# Altium PCB Electronic_Load_1.PcbDoc
Units mm, origin at the board's own origin, x right, y up, seen from the top; angles counter-clockwise.
Board outline 99.82 x 90.42 mm, 2 copper layers (Top Layer, Bottom Layer); 52 components, 43 nets, 171 pads, 0 vias.
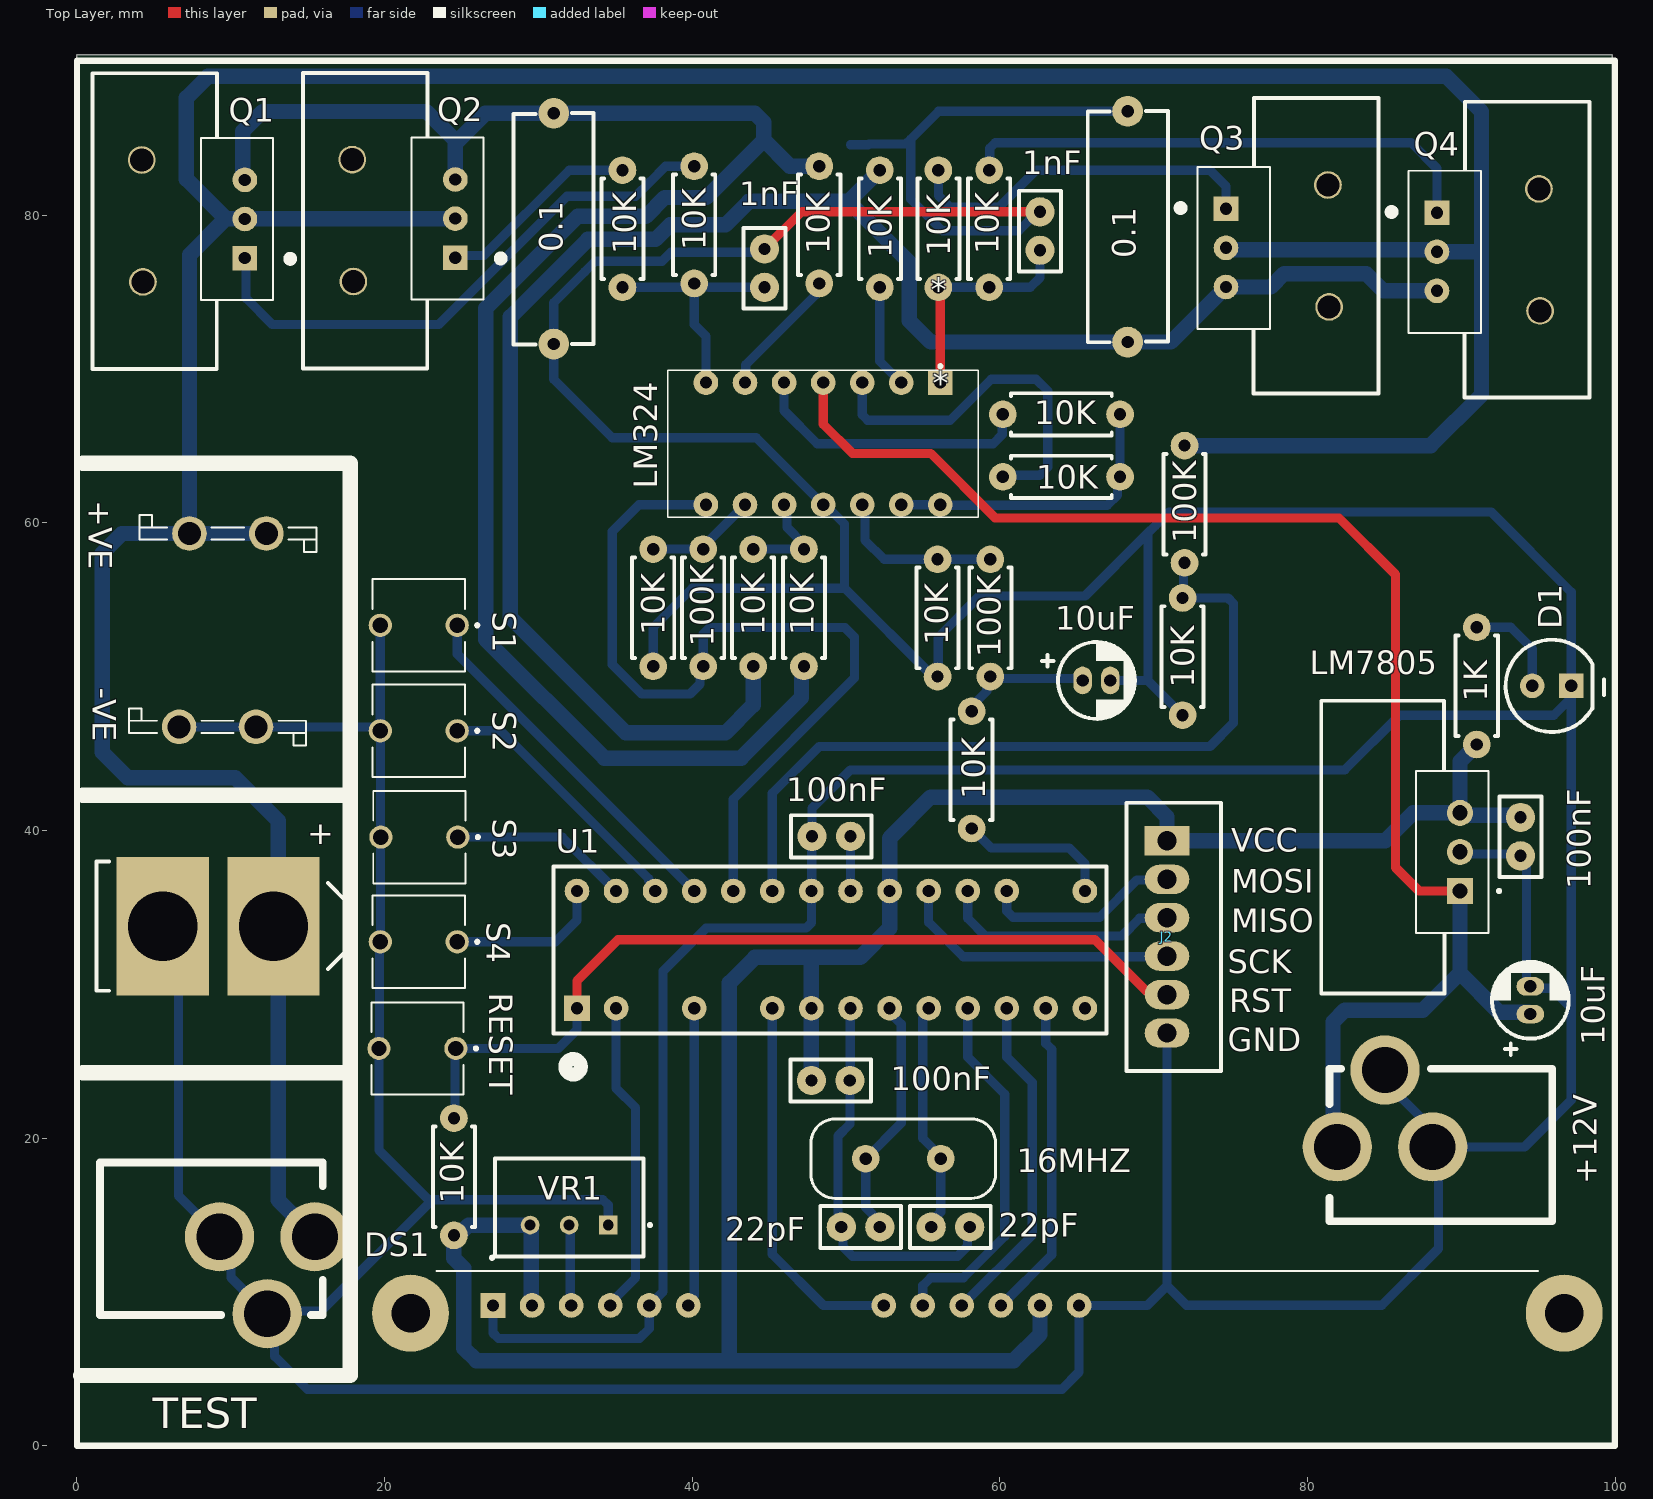
[diagram p0: Top Layer view]
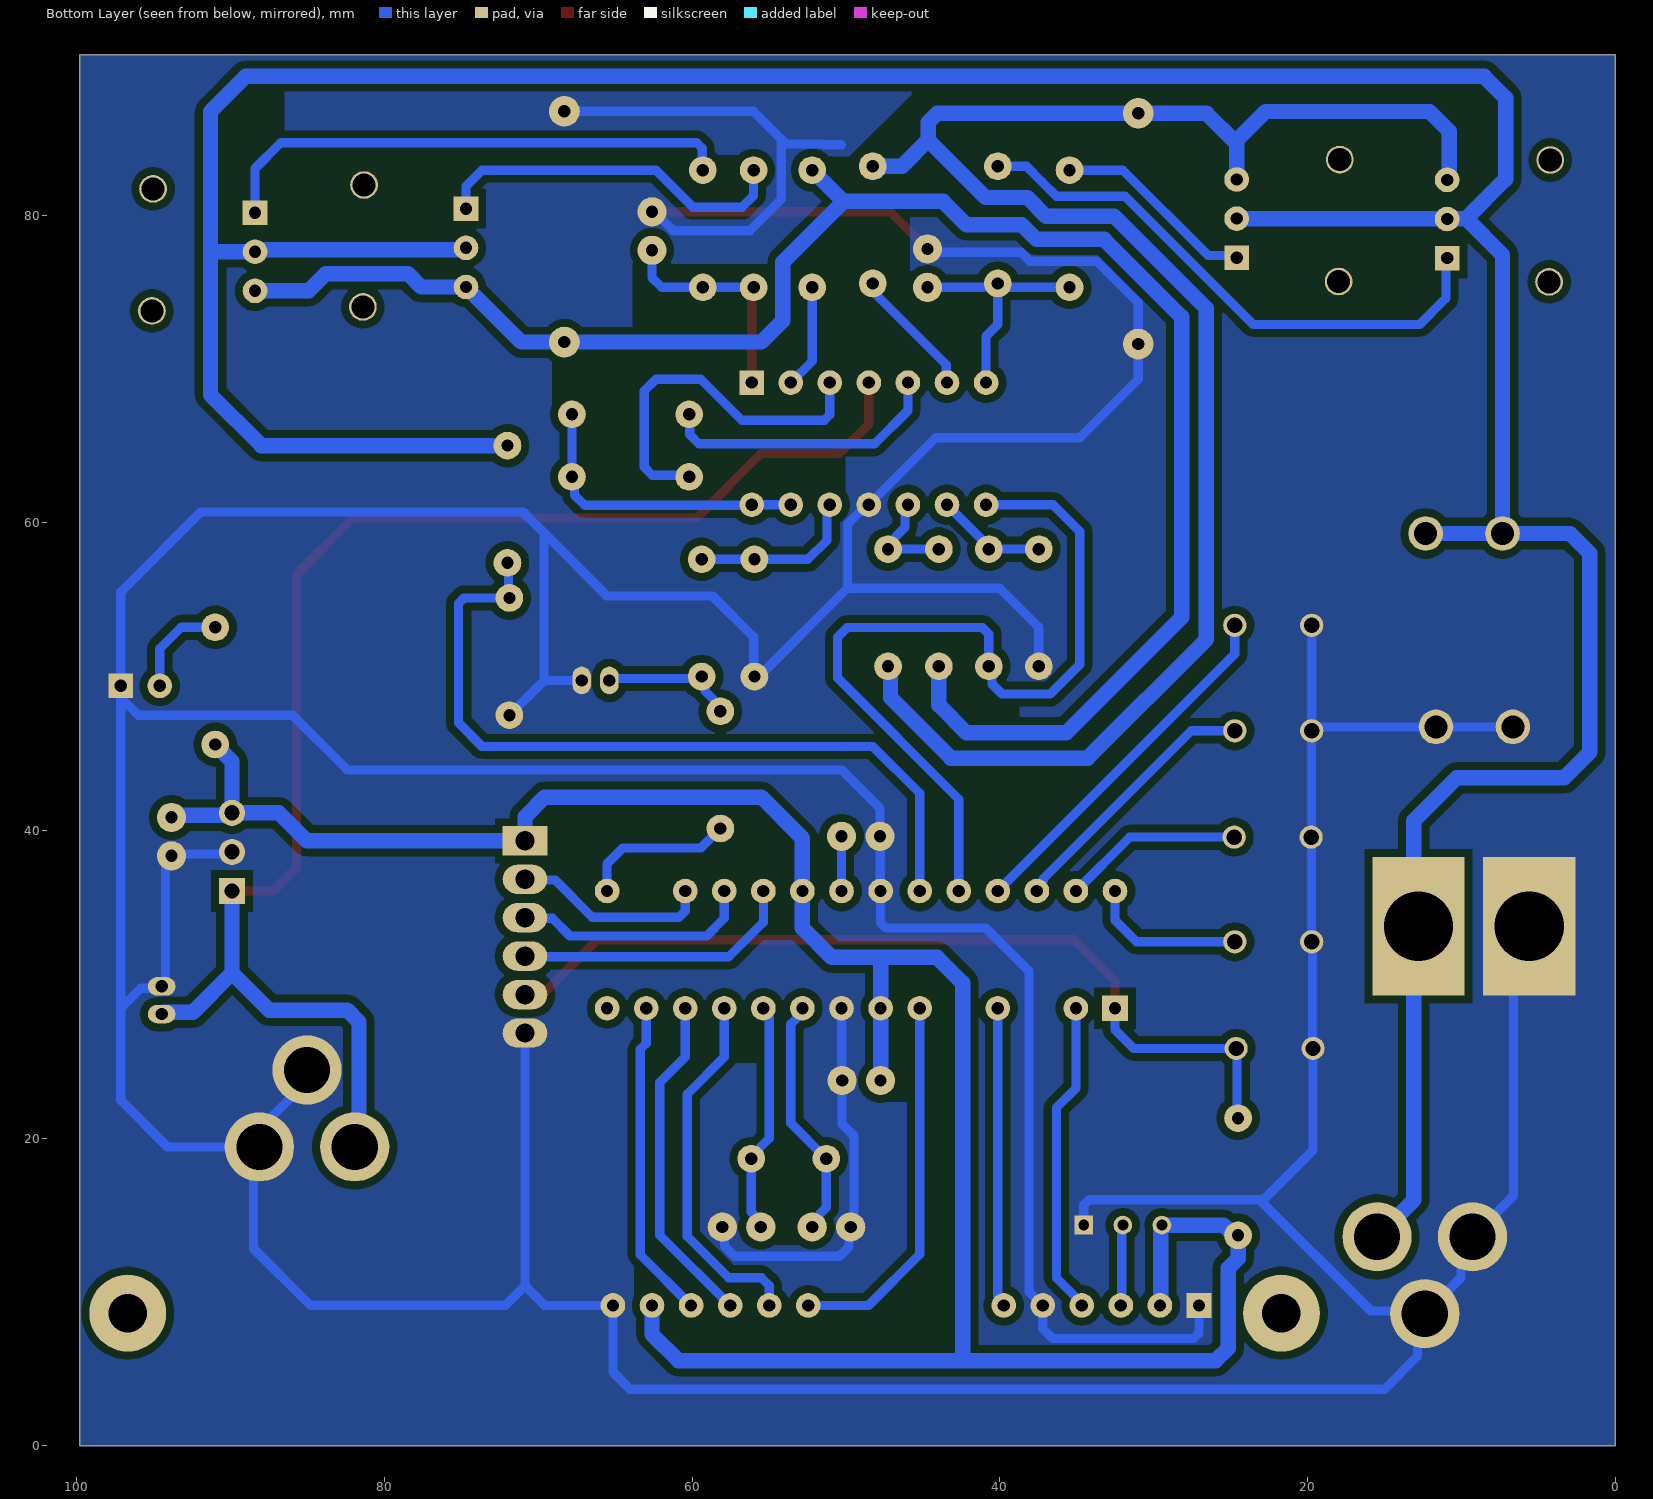
[diagram p1: Bottom Layer view, seen from below]
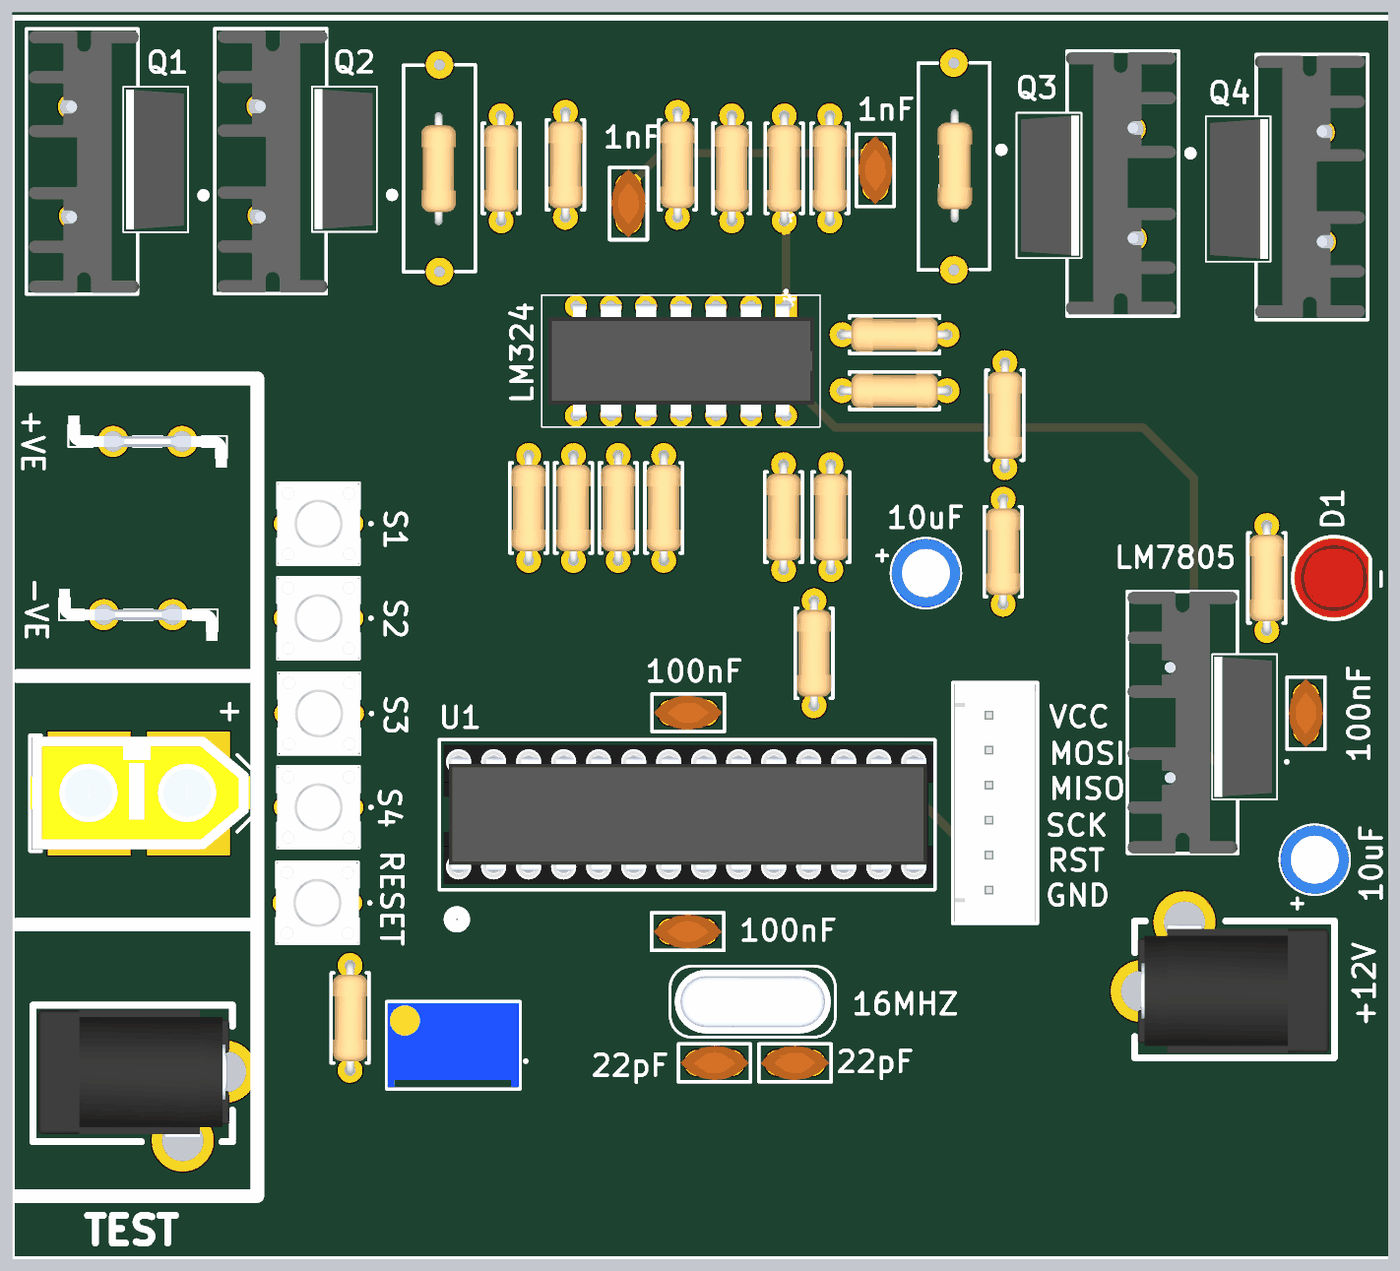
[diagram p2: 3D render of the assembled board from above, using the file's embedded part models]

## Layer stack, top to bottom
Top Solder: solder mask 0.0102, Solder Resist, Dk 3.5
Top Layer: signal copper 0.0356
Dielectric 1: dielectric 0.32, FR-4, Dk 4.8
Bottom Layer: signal copper 0.0356
Bottom Solder: solder mask 0.0102, Solder Resist, Dk 3.5

## Board outline
0,0 99.822,0 99.822,90.424 0,90.424

## Design rules (kind name [scope] priority, off if disabled: settings)
Clearance [All] p1: gap=0.5 ignorepadtopadclearanceinfootprint=FALSE
PlaneClearance [All] p1: clearance=0.7
PlaneConnect [All] p1: planeconnectstyle=Direct reliefexpansion=0.508 reliefentries=4 reliefconductorwidth=0.254 reliefairgap=0.254
PolygonConnect [All] p1: connectstyle=Direct reliefconductorwidth=0.254 reliefentries=4 polygonreliefangle="90 Angle" airgapwidth=0.254
RoutingVias [All] p1: holewidth=0.711 width=1.27 viastyle="Through Hole" minholewidth=0.711 minwidth=1.27 maxholewidth=0.711 maxwidth=1.27
SolderMaskExpansion [All] p1: expansion=0.102 istentingtop=FALSE
Width [All] p1: maxlimit=1 minlimit=0.5 preferedwidth=0.6
28 further rules are at their usual default settings.

## Components (designator, comment, footprint, x,y, rotation, side; value= is the part's Value field where it differs from the comment)
0.1 "0.1" "2W_resistor_through hole" 31,71.628 r90 top (schematic designator R21)
0.1 "0.1" "2W_resistor_through hole" 68.308,86.755 r270 top (schematic designator R20)
1K "1K" "resistor_through hole" 91.007,49.403 r270 top (schematic designator R1)
1nF "1nF" Cap_nonpolarized_2.5mm 62.611,77.724 r90 top (schematic designator C9)
1nF "1nF" Cap_nonpolarized_2.5mm 44.704,75.311 r90 top (schematic designator C8)
10K "10K" "resistor_through hole" 43.962,54.483 r90 top (schematic designator R19)
10K "10K" "resistor_through hole" 52.197,79.121 r90 top (schematic designator R18)
10K "10K" "resistor_through hole" 47.264,54.483 r90 top (schematic designator R17)
10K "10K" "resistor_through hole" 48.26,79.375 r90 top (schematic designator R16)
10K "10K" "resistor_through hole" 64.008,62.992 r180 top (schematic designator R15)
10K "10K" "resistor_through hole" 56.007,79.121 r90 top (schematic designator R14)
10K "10K" "resistor_through hole" 35.469,79.121 r90 top (schematic designator R13)
10K "10K" "resistor_through hole" 64.008,67.056 r180 top (schematic designator R12)
10K "10K" "resistor_through hole" 59.309,79.121 r90 top (schematic designator R11)
10K "10K" "resistor_through hole" 40.132,79.375 r90 top (schematic designator R10)
10K "10K" "resistor_through hole" 55.953,53.819 r90 top (schematic designator R9)
10K "10K" "resistor_through hole" 71.882,51.308 r270 top (schematic designator R8)
10K "10K" "resistor_through hole" 37.465,54.483 r90 top (schematic designator R7)
10K "10K" "resistor_through hole" 58.166,43.942 r90 top (schematic designator R5)
10K "10K" "resistor_through hole" 24.511,17.491 r90 top (schematic designator R2)
10uF "10uF" CP_Radial_D4.0mm_P1.50mm 66.283,49.755 r0 top (schematic designator C7)
10uF "10uF" CP_Radial_D4.0mm_P1.50mm 94.488,28.967 r90 top (schematic designator C4)
16MHZ "ECS-160-20-4X-DU" XTAL_ECS-160-20-4X-DU 53.721,18.669 r180 top (schematic designator Y1)
22pF "22pF" Cap_nonpolarized_2.5mm 58.039,14.224 r180 top (schematic designator C6)
22pF "22pF" Cap_nonpolarized_2.5mm 49.697,14.224 r0 top (schematic designator C5)
100K "100K" "resistor_through hole" 59.382,53.819 r90 top (schematic designator R6)
100K "100K" "resistor_through hole" 72.009,61.214 r270 top (schematic designator R4)
100K "100K" "resistor_through hole" 40.713,54.483 r270 top (schematic designator R3)
100nF "100nF" Cap_nonpolarized_2.5mm 93.853,40.854 r270 top (schematic designator C3)
100nF "100nF" Cap_nonpolarized_2.5mm 50.292,39.624 r180 top (schematic designator C2)
100nF "100nF" Cap_nonpolarized_2.5mm 47.752,23.749 r0 top (schematic designator C1)
+ "XT - 60" XT-60 5.588,33.782 r0 top (schematic designator J3)
+12V "3 pin power jack" DC_POWER_JACK_2.7MM 81.938,19.431 r180 top (schematic designator J1)
+VE "Terminal PCB Male Flat 6.3mm" "Terminal PCB Male Flat 6.3mm" 9.819,59.309 r180 top (schematic designator H1)
-VE "Terminal PCB Male Flat 6.3mm" "Terminal PCB Male Flat 6.3mm" 9.144,46.736 r180 top (schematic designator H2)
D1 "LED" LED_TH_2.54mm 95.885,49.403 r180 top
DS1 "LCD_16x2" LCD_16x2 59.191,-6.875 r0 top
J2 "6 pin socket" "Jst - XH - 6pins" 70.866,39.33 r0 top
J4 "3 pin power jack" DC_POWER_JACK_2.7MM 15.471,13.589 r0 top
LM324 "LM324NSR" DIP794W45P254L1969H508Q14 48.514,65.151 r270 top (schematic designator U2)
LM7805 "LM7805CT/NOPB" TO254P1054X470X1955-3 89.916,38.608 r90 top (schematic designator Q1)
Q1 "NTP30N06L" NTP30N06L 10.922,79.756 r90 top (schematic designator Q2)
Q2 "NTP30N06L" NTP30N06L 24.606,79.781 r90 top (schematic designator Q4)
Q3 "NTP30N06L" NTP30N06L 74.701,77.876 r270 top (schematic designator Q5)
Q4 "NTP30N06L" NTP30N06L 88.417,77.622 r270 top (schematic designator Q3)
RESET "BUTT-2" SW_BUTT-2 22.138,25.832 r180 top (schematic designator S5)
S1 "BUTT-2" SW_BUTT-2 22.225,53.34 r180 top
S2 "BUTT-2" SW_BUTT-2 22.225,46.482 r180 top
S3 "BUTT-2" SW_BUTT-2 22.265,39.57 r180 top
S4 "BUTT-2" SW_BUTT-2 22.225,32.766 r180 top
U1 "ATMEGA8A-PU" ATMEGA8A-PU 49.022,32.258 r90 top
VR1 "10K_TRIM_POT" TRIM_3296W-OT1-103LF 32.004,14.351 r180 top

## Footprints (in the part's own frame and the unit in brackets; to place one, negate y for a bottom-side part, rotate by r counter-clockwise, add the part's x,y. Pads: shape width x height; smd on the part's side, far side on the other; paste and mask are expansions set on the pad)
"2W_resistor_through hole" [mm]
  round 2 hole 0.8: 1(0,0) 2(15,0)
  silkscreen extent -0.03,-2.59 15.01,2.62, body extent 3.36,-1.17 11.58,1.32, height 2.5
ATMEGA8A-PU [mm]
  rect 1.676x1.676 / inner round 1.676 / far side rect 1.676x1.676 hole 0.8: 1(-3.81,16.51)
  round 1.6 hole 0.8: 2(-3.81,13.97) 4(-3.81,8.89) 6(-3.81,3.81) 7(-3.81,1.27) 8(-3.81,-1.27) 9(-3.81,-3.81) 10(-3.81,-6.35) 11(-3.81,-8.89) 12(-3.81,-11.43) 13(-3.81,-13.97) 14(-3.81,-16.51) 15(3.81,-16.51) 17(3.81,-11.43) 18(3.81,-8.89) 19(3.81,-6.35) 20(3.81,-3.81) 21(3.81,-1.27) 22(3.81,1.27) 23(3.81,3.81) 24(3.81,6.35) 25(3.81,8.89) 26(3.81,11.43) 27(3.81,13.97) 28(3.81,16.51)
  silkscreen extent -8.13,-17.91 5.41,18.03, body extent -5.08,-17.75 5.08,17.75, height 4.83
Cap_nonpolarized_2.5mm [mm]
  round 1.9 hole 0.8: 1(0,0) 2(2.5,0)
  silkscreen extent -1.37,-1.37 3.87,1.37, body extent -1.25,-1.25 3.75,1.25, height 5.1
CP_Radial_D4.0mm_P1.50mm [mm]
  oval 1.2x1.8 hole 0.8: 1(-0.9,0) 2(0.9,0)
  silkscreen extent -3.56,-2.54 2.54,2.54, body extent -2.5,-2.5 2.5,2.5, height 7.1
DC_POWER_JACK_2.7MM [mm]
  round 4.5 hole 3: 1(0,0) 2(-3.1,-5) 3(-6.2,0)
  silkscreen extent -13.97,-5.08 0.51,4.83, body extent -13.6,-4.82 0.3,4.48, height 11.01
DIP794W45P254L1969H508Q14 [mm]
  rect 1.6x1.6 hole 0.8: 1(-3.97,7.62)
  round 1.6 hole 0.8: 2(-3.97,5.08) 3(-3.97,2.54) 4(-3.97,0) 5(-3.97,-2.54) 6(-3.97,-5.08) 7(-3.97,-7.62) 8(3.97,-7.62) 9(3.97,-5.08) 10(3.97,-2.54) 11(3.97,0) 12(3.97,2.54) 13(3.97,5.08) 14(3.97,7.62)
  silkscreen extent -5.13,-10.09 4.78,10.09, body extent -4.1,-9.65 4.1,9.65, height 5.08
"Jst - XH - 6pins" [mm]
  rect 2.9x1.9 hole 1.25: 1(0,0)
  oval 2.9x1.9 hole 1.25: 2(0,-2.5) 3(0,-5) 4(0,-7.5) 5(0,-10) 6(0,-12.5)
  silkscreen extent -2.64,-14.98 3.51,2.48, body extent -2.49,-14.91 3.35,2.46, height 7.21
LCD_16x2 [mm]
  rect 1.6x1.6 hole 0.8: 1(-32.14,16)
  round 1.6 hole 0.8: 2(-29.6,16) 3(-27.06,16) 4(-24.52,16) 5(-21.98,16) 6(-19.44,16) 11(-6.74,16) 12(-4.2,16) 13(-1.66,16) 14(0.88,16) 15(3.42,16) 16(5.96,16)
  round 5 hole 2.5: S1(-37.5,15.5) S2(37.5,15.5)
  silkscreen extent -35.8,18.25 35.8,19.2, body extent -40,-18 40,18, height 8.9
LED_TH_2.54mm [mm]
  round 1.6 hole 0.8: 1(1.27,0)
  rect 1.6x1.6 hole 0.8: 2(-1.27,0)
  silkscreen extent -3.4,-3 3,3, body extent -2.5,-2.9 2.9,2.9, height 8.6
NTP30N06L [mm]
  rect 1.6x1.6 hole 0.8: 1(-2.54,0)
  round 1.6 hole 0.8: 2(0,0) 3(2.54,0)
  round 1.8 hole 1.5: 4(-4.089,6.629) 5(3.835,6.706)
  silkscreen extent -9.75,-3.15 9.47,9.91, body extent -9.68,-1.52 9.32,9.72, height 25
"resistor_through hole" [mm]
  round 1.8 hole 0.8: 1(-3.81,0) 2(3.81,0)
  silkscreen extent -3.27,-1.37 3.27,1.37, body extent -4.11,-1.24 4.11,1.25, height 2.5
SW_BUTT-2 [mm]
  round 1.508 hole 1: 1(-2.5,0) 2(2.5,0)
  silkscreen extent -3.9,-3 3,3, body extent -3,-3 3,3, height 8.5
"Terminal PCB Male Flat 6.3mm" [mm]
  round 2.25 hole 1.5: 1(-2.5,0) 2(2.5,0)
  silkscreen extent -5.75,-1.2 5.75,1.2, body extent -5.75,-1.9 5.75,1.9, height 12.1
TO254P1054X470X1955-3 [mm]
  rect 1.7x1.7 hole 1: 1(-2.54,0)
  round 1.7 hole 1: 2(0,0) 3(2.54,0)
  silkscreen extent -9.19,-2.64 9.83,9.02, body extent -9.2,-1.49 9.8,9.02, height 25
TRIM_3296W-OT1-103LF [mm]
  rect 1.218x1.218 / inner round 1.218 / far side rect 1.218x1.218 hole 0.71: 1(-2.54,0)
  round 1.218 hole 0.71: 2(0,0) 3(2.54,0)
  silkscreen extent -5.35,-4.32 4.83,2.03, body extent -4.74,-4.22 4.79,1.88, height 11.56
XT-60 [mm]
  rect 6x9 hole 4.5: 1(0,0) 2(7.2,0)
  silkscreen extent -4.3,-4.2 12.01,4.2, body extent -4.25,-4.05 11.65,4.1, height 18.21
XTAL_ECS-160-20-4X-DU [mm]
  round 1.8 hole 0.8: 1(-2.44,0) 2(2.44,0)
  silkscreen extent -6,-2.58 6,2.58, body extent -5.68,-2.32 5.68,2.32, height 3.5

## Part data
0.1 0.1: library part US_Resistor, "Generial resistor for through hole or SMD resistors"
1K 10K 10K 10K 10K 10K 10K 10K 10K 10K 10K 10K 10K 10K 10K 10K 100K 100K 100K: library part 1206_RESISTOR, "RES 0.24 OHM 1% 1/4W 1206", Package=1206, Power_Rating=".25 W", Resistance=24, Tolerance=1%, Availability=Unavailable, EU_RoHS_Compliance="Compliant with Exemptions", MF="TE Connectivity", MP=2-1879462-9, Price=None, SnapEDA_Link=https://www.snapeda.com/parts/2-1879462-9/TE%20Connectivity/view-part/2213899/?ref=snap
1nF 1nF 22pF 22pF 100nF 100nF 100nF: library part CAP1206, "ceramic cap", Package="1206 Murata", Availability="In Stock", Check_prices=https://www.snapeda.com/parts/GRM31CC80E157ME11K/Murata/view-part/?ref=eda, MF=Murata, MP=GRM31CC80E157ME11K, Price=None, Purchase-URL=https://pricing.snapeda.com/search/part/GRM31CC80E157ME11K/?ref=eda, SnapEDA_Link=https://www.snapeda.com/parts/GRM31CC80E157ME11K/Murata/view-part/?ref=snap
10uF 10uF: library part "Polarized capacitors", "Generial polarized capacitor for through hole or SMD capacitors"
16MHZ: "16MHz Â±30ppm Crystal 20pF 40 Ohms HC-49/US", Package="HC-49/US ECS International", Digi-Key_Part_Number=XC1925-ND, Digi-Key_Purchase_URL=https://www.digikey.com/product-detail/en/ecs-inc/ECS-160-20-4X-DU/XC1925-ND/2781930?utm_source=snapeda&utm_medium=aggregator&utm_campaign=symbol, MF="ECS Inc.", MP=ECS-160-20-4X-DU, SnapEDA_Link=https://www.snapeda.com/parts/ECS-160-20-4X-DU/ECS%20Inc./view-part/2154532/?ref=snap
+12V J4: library part "DC Power Jack", "DC Power Jack / generic 3 pins connector"
+VE -VE: "PCR250 - Valcon PCB Mount Spade Terminal, 12.1mm PCB Profile", Package=None, Availability=Unavailable, MP=PCR250, Price=None
DS1: "Display: LCD; alphanumeric; STN Negative; 16x2; blue; LED; PIN: 16", Package=None, Availability="Not in stock", Check_prices=https://www.snapeda.com/parts/RC1602B-BIW-CSV/Raystar/view-part/?ref=eda, MF=Raystar, MP=RC1602B-BIW-CSV, Price=None, SnapEDA_Link=https://www.snapeda.com/parts/RC1602B-BIW-CSV/Raystar/view-part/?ref=snap
J2: library part "Jst - XH -6pins"
LM324: "4-Channel industry standard operational amplifier 14-SO 0 to 70", Package="SOP-14 Texas Instruments", Availability=Warning, Check_prices=https://www.snapeda.com/parts/LM324NSR/Texas%20Instruments/view-part/1807/?ref=eda, MF="Texas Instruments", MP=LM324NSR, Price=None, Purchase-URL=https://pricing.snapeda.com/search/part/LM324NSR/?ref=eda, SnapEDA_Link=https://www.snapeda.com/parts/LM324NSR/Texas%20Instruments/view-part/1807/?ref=snap
LM7805: Package=None, Availability=Unavailable, MP=LM7805CT/NOPB, Price=None
Q1 Q2 Q3 Q4: "N-Channel 100 V 9.2A (Tc) 3.7W (Ta), 60W (Tc) Surface Mount D2PAK", Package="TO-220-3 Vishay", Availability="In Stock", Check_prices=https://www.snapeda.com/parts/IRF520/Vishay+Siliconix/view-part/?ref=eda, MF="Vishay Siliconix", MP=IRF520, Price=None, Purchase-URL=https://pricing.snapeda.com/search/part/IRF520/?ref=eda, SnapEDA_Link=https://www.snapeda.com/parts/IRF520/Vishay+Siliconix/view-part/?ref=snap
RESET S1 S2 S3 S4: "Tactile Switches MINI PUSH BUTTON SWITCH 2-PIN QTY. 4", Package=None, Availability="In Stock", Check_prices=https://www.snapeda.com/parts/BUTT-2/Gravitech/view-part/?ref=eda, MF=Gravitech, MP=BUTT-2, Price=None, Purchase-URL=https://pricing.snapeda.com/search/part/BUTT-2/?ref=eda, SnapEDA_Link=https://www.snapeda.com/parts/BUTT-2/Gravitech/view-part/?ref=snap
U1: "AVR AVRÂ® ATmega Microcontroller IC 8-Bit 16MHz 8KB (4K x 16) FLASH 28-PDIP", Package=PDIP-28, Availability=Unavailable, Check_prices=https://www.snapeda.com/parts/ATMEGA8A-PU/Microchip/view-part/?ref=eda, MF=Microchip, MP=ATMEGA8A-PU, Price=None, SnapEDA_Link=https://www.snapeda.com/parts/ATMEGA8A-PU/Microchip/view-part/?ref=snap
VR1: library part 3296W-OT1-103LF, "Trimmer Resistors - Through Hole 3/8 SQ CERMET 10K SEALED TRIM POT", Package=None, Check_prices=https://www.snapeda.com/parts/3296W-OT1-103LF/Bourns/view-part/?ref=eda, MF=Bourns, MP=3296W-OT1-103LF, SnapEDA_Link=https://www.snapeda.com/parts/3296W-OT1-103LF/Bourns/view-part/?ref=snap

## Nets (pads, with @x,y where several pads share a name; then routed paths per layer and width w, separated by ;. In a path a pad name is that pad's centre, name@x,y a point inside that pad or via, vN(x,y) a via of type N, cw(c..) or ccw(c..) an arc to the next point about the centre after c; other vN are vias at no path point)
ADJ: 10K.1@67.818,62.992 10K.1@67.818,67.056 LM324.13 LM324.14 | length 19.7
  Bottom Layer w0.6: LM324.13 LM324.14 56.173,61.142 66.984,61.142 67.647,61.805 67.647,62.821 67.818,62.992 10K.1@67.818,67.056
BTN1: S1.1 U1.25 | length 23.7
  Bottom Layer w0.6: S1.1 24.725,51.475 U1.25
BTN2: S2.1 U1.26 | length 17.4
  Bottom Layer w0.6: S2.1 27.559,46.482 37.18,36.861 37.18,36.75 37.592,36.339 U1.26
BTN3: S3.1 U1.27 | length 11.7
  Bottom Layer w0.6: S3.1 31.55,39.57 U1.27
BTN4: S4.1 U1.28 | length 10.3
  Bottom Layer w0.6: S4.1 31.115,32.766 32.512,34.163 U1.28
CO: 10K.2@43.962,58.293 10K.2@47.264,58.293 LM324.10 | length 7.6
  Bottom Layer w0.6: 10K.2@43.962,58.921 43.962,58.293 47.264,58.293 47.264,58.618 46.165,59.716 46.165,60.99 LM324.10 45.974,61.038 LM324.10@45.867,60.93
CS: 100K.2@40.713,50.673 LM324.8 U1.24 | length 55.6
  Bottom Layer w0.6: LM324.8 36.543,61.181 34.798,59.436 34.798,50.794 36.719,48.873 39.856,48.873 40.512,49.529 40.512,50.472 40.713,50.673 40.713,52.778 41.125,53.19 49.934,53.19 50.546,52.578 50.546,49.911 42.672,42.037 U1.24
D4: DS1.11 U1.6 | length 24.7
  Bottom Layer w0.6: U1.6@45.212,28.548 45.212,12.446 48.533,9.125 DS1.11
D5: DS1.12 U1.11 | length 24.1
  Bottom Layer w0.6: DS1.12 54.991,10.414 55.499,10.922 57.631,10.922 60.325,13.616 60.325,22.86 57.912,25.273 U1.11@57.912,28.809
D6: DS1.13 U1.12 | length 22.4
  Bottom Layer w0.6: DS1.13 62.103,13.697 62.103,23.622 60.452,25.273 U1.12@60.452,28.952
D7: DS1.14 U1.13 | length 21
  Bottom Layer w0.6: DS1.14 63.373,12.427 63.373,25.781 62.992,26.162 U1.13@62.992,28.62
E: DS1.6 U1.4 | length 19.5
  Bottom Layer w0.6: DS1.6 39.751,9.396 40.132,9.777 U1.4@40.132,28.501
GND: 0.1.1 1nF.2 10K.1@37.465,50.673 10K.1@55.953,50.009 10K.2@71.882,47.498 10uF.2 22pF.1 100nF.2 +12V.2 +12V.3 +.1 -VE.1 -VE.2 D1.2 DS1.1 DS1.5 DS1.16 J2.6 J4.2 J4.3 LM324.11 LM7805.2 RESET.2 S1.2 S2.2 S3.2 S4.2 U1.8 U1.22 VR1.1 | length 600.5
  Top Layer w0.6: 1nF.2@44.704,77.811 47.117,80.224 1nF.2@62.611,80.224
  Bottom Layer w0.6: +.1 5.588,32.282 6.604,31.266 6.604,16.256 J4.3 10.017,12.843 10.017,10.943 J4.2 ; -VE.2@6.614,46.736 -VE.2 -VE.1 19.225,46.736 19.479,46.482 S2.2 ; S1.2 S2.2 ; DS1.1 27.051,7.336 27.402,6.985 36.576,6.985 37.211,7.62 DS1.5 38.1,10.014 38.1,30.861 40.894,33.655 47.401,33.655 47.752,34.006 U1.22 47.772,36.088 47.772,39.604 47.792,39.624 47.792,41.442 50.292,43.942 82.423,43.942 85.979,47.498 96.012,47.498 D1.2@97.155,48.641 ; VR1.1 34.544,15.651 34.193,16.002 23.114,16.002 ; 10K.1@37.465,50.673 37.465,53.213 40.005,55.753 49.911,55.753 ; 1nF.2@44.704,77.811 44.49,77.597 38.62,77.597 38.034,77.011 33.704,77.011 33.02,76.327 31,74.307 31,71.628 31,69.33 34.798,65.532 44.163,65.532 LM324.11 48.65,61.181 49.911,59.92 49.911,55.753 ; U1.8 50.272,28.428 50.272,23.769 50.252,23.749 50.252,20.915 49.481,20.144 49.481,14.44 49.697,14.224 49.814,14.107 49.814,12.924 50.419,12.319 57.254,12.319 57.891,12.956 57.891,14.076 22pF.1@58.039,14.224 ; 50.292,84.582 51.444,84.582 51.493,84.631 53.897,84.631 54.207,84.941 ; 1nF.2@62.611,80.224 62.455,80.224 61.225,78.994 56.261,78.994 54.207,81.048 54.207,84.941 ; DS1.16@65.197,9.171 DS1.16 ; 10uF.2@67.183,49.755 69.625,49.755 ; 0.1.1@68.308,86.755 56.021,86.755 54.207,84.941 ; J2.6 70.866,10.414 ; 10K.2@71.882,47.498 69.625,49.755 ; +12V.2 85.038,23.674 87.392,21.32 87.392,20.177 +12V.3 94.107,19.431 97.155,22.479 97.155,28.448 ; +12V.3@88.519,17.256 88.519,12.827 84.836,9.144 72.136,9.144 70.866,10.414 ; LM7805.2 90.043,38.481 93.726,38.481 93.853,38.354 93.853,38.002 94.234,37.621 94.234,30.121 94.488,29.867 94.603,29.752 95.851,29.752 97.155,28.448 ; J4.2 12.545,8.763 15.875,8.763 23.114,16.002 ; J4.2 12.853,8.107 12.853,5.816 14.986,3.683 64.038,3.683 65.151,4.796 DS1.16 ; S2.2 19.745,46.462 19.745,39.59 S3.2 19.745,39.55 19.745,32.786 S4.2 19.681,32.722 19.681,25.875 RESET.2 19.638,19.224 22.86,16.002 23.114,16.002 ; 49.911,55.753 55.655,50.009 55.953,50.009 56.004,50.06 56.004,52.575 58.674,55.245 65.532,55.245 69.625,59.338 ; DS1.16 69.577,9.125 70.866,10.414 ; 69.625,49.755 69.625,59.338 ; 69.625,59.338 70.104,59.817 70.993,60.706 91.948,60.706 97.155,55.499 D1.2 D1.2@97.155,48.641 ; 97.155,28.448 D1.2@97.155,48.641
LOAD: 100K.1@72.009,65.024 +.2 +VE.1 +VE.2 J4.1 Q1.2 Q2.2 Q3.2 Q4.2 | length 252.2
  Bottom Layer w1: +VE.1 +VE.2 ; J4.1 13.081,15.979 13.081,40.64 10.287,43.434 3.302,43.434 1.651,45.085 1.651,58.039 2.921,59.309 +VE.2 ; Q2.2@24.547,79.722 24.487,79.781 10.922,79.781 9.677,79.781 ; 100K.1@72.009,65.024 88.011,65.024 91.313,68.326 91.313,77.622 ; Q3.2 74.828,77.749 88.29,77.749 Q4.2 91.313,77.622 ; +VE.2 7.319,77.423 9.677,79.781 ; 9.677,79.781 7.112,82.347 7.112,87.63 8.509,89.027 89.027,89.027 91.313,86.741 91.313,77.622
MISO: J2.3 U1.18 | length 16.7
  Bottom Layer w0.6: U1.18 57.912,34.29 59.055,33.147 67.945,33.147 69.088,34.29 J2.3@71.882,34.29
MOSI: J2.2 U1.17 | length 13.9
  Bottom Layer w0.6: U1.17 60.452,34.768 60.852,34.368 66.499,34.368 68.921,36.79 J2.2@71.882,36.79
NetC2_1: 100nF.1@50.292,39.624 U1.21 | length 3.6
  Bottom Layer w0.6: U1.21 100nF.1@50.292,39.624
NetC5_2: 16MHZ.2 22pF.2@52.197,14.224 U1.9 | length 16
  Bottom Layer w0.6: 22pF.2@52.256,14.283 52.197,14.224 52.197,14.576 51.281,15.492 16MHZ.2 53.594,20.982 53.594,27.415 52.832,28.177 U1.9
NetC6_2: 16MHZ.1 22pF.2@55.539,14.224 U1.10 | length 15.1
  Bottom Layer w0.6: U1.10 55.372,28.177 54.991,27.796 54.991,20.001 56.161,18.831 56.161,15.198 55.539,14.576 22pF.2@55.539,14.224
NetC7_1: 10K.2@58.166,47.752 10uF.1@65.383,49.755 100K.1@59.382,50.009 | length 8.9
  Bottom Layer w0.6: 10K.2@58.139,47.779 58.166,47.752 58.166,48.077 59.153,49.063 59.153,49.78 59.382,50.009 59.509,49.882 65.256,49.882 10uF.1@65.383,49.755
NetC8_1: 1nF.1@44.704,75.311 10K.1@35.469,75.311 10K.1@40.132,75.565 LM324.7 | length 16
  Bottom Layer w0.6: 10K.1@34.963,75.311 39.553,75.311 10K.1@39.68,75.438 ; 10K.1@40.132,75.24 40.132,72.898 40.894,72.136 LM324.7 ; 10K.1@40.132,75.565 40.386,75.311 40.41,75.335 41.059,75.335 41.083,75.311 44.353,75.311 1nF.1@44.704,75.662
NetC9_1: 1nF.1@62.611,77.724 10K.1@56.007,75.311 10K.1@59.309,75.311 LM324.1 | length 14.9
  Top Layer w0.6: 10K.1@56.007,75.311 56.134,75.184 LM324.1
  Bottom Layer w0.6: 10K.1@56.007,75.311 59.309,75.311 61.976,75.311 62.611,75.946 1nF.1@62.611,77.724
NetD1_1: 1K.1 D1.1 | length 6.6
  Bottom Layer w0.6: 1K.1 93.218,53.213 94.615,51.816 D1.1
NetDS1_3: DS1.3 VR1.2 | length 5.3
  Bottom Layer w0.6: VR1.2 32.067,14.287 32.067,9.189 DS1.3
NetQ2_1: 10K.2@40.132,83.185 Q1.1 | length 36.6
  Bottom Layer w0.6: Q1.1@10.795,77.01 11.001,76.805 11.001,74.597 12.7,72.898 23.527,72.898 31.86,81.231 36.314,81.231 37.269,82.185 38.268,83.185 10K.2@40.132,83.185
NetQ2_3: 0.1.2@31,86.628 10K.1@47.264,50.673 10K.2@48.26,83.185 Q1.3 Q2.3 | length 119.2
  Bottom Layer w1: Q1.3@10.795,82.117 10.795,85.471 12.065,86.741 22.719,86.741 24.606,84.854 ; Q2.3 24.606,84.854 ; 10K.1@47.264,50.673 47.11,50.52 47.11,48.634 43.18,44.704 34.29,44.704 26.579,52.415 26.579,73.95 32.56,79.931 36.994,79.931 38.216,81.153 40.928,81.153 44.658,84.882 ; 10K.2@48.26,83.185 46.355,83.185 44.658,84.882 ; 24.606,84.854 24.695,84.766 26.557,86.628 31,86.628 44.072,86.628 44.658,86.042 44.658,84.882
NetQ3_1: 10K.2@59.309,82.931 Q4.1 | length 34.2
  Bottom Layer w0.6: 10K.2@59.309,82.931 59.347,82.969 59.347,84.358 59.698,84.709 86.741,84.709 88.417,83.033 Q4.1
NetQ3_3: 0.1.2@68.308,71.755 10K.1@43.962,50.673 10K.2@52.197,82.931 Q3.3 Q4.3 | length 116.2
  Bottom Layer w1: 10K.1@43.962,50.673 43.962,48.153 42.164,46.355 35.687,46.355 28.179,53.863 28.179,73.391 33.219,78.431 37.615,78.431 38.559,79.375 42.164,79.375 43.688,80.899 50.165,80.899 ; 10K.2@52.197,82.931 50.165,80.899 ; Q4.3 84.938,75.082 83.82,76.2 78.486,76.2 77.622,75.336 Q3.3 71.12,71.755 68.308,71.755 55.499,71.755 54.102,73.152 54.102,76.962 50.356,80.709 50.165,80.899
NetQ4_1: 10K.2@35.469,82.931 Q2.1 | length 13.2
  Bottom Layer w0.6: Q2.1 24.753,77.389 26.462,77.389 32.004,82.931 10K.2@35.469,82.931
NetQ5_1: 10K.2@56.007,82.931 Q3.1 | length 23.6
  Bottom Layer w0.6: 10K.2@56.007,82.931 56.007,81.28 56.769,80.518 59.944,80.518 62.357,82.931 73.66,82.931 74.701,81.89 Q3.1
NetR3_1: 10K.2@37.465,58.293 100K.1@40.713,58.293 LM324.9 | length 7.3
  Bottom Layer w0.6: 10K.2@37.465,58.293 40.713,58.293 40.713,58.46 LM324.9
NetR6_2: 10K.2@55.953,57.629 100K.2@59.382,57.629 LM324.12 | length 11
  Bottom Layer w0.6: LM324.12 51.228,61.007 51.228,58.881 52.48,57.629 55.953,57.629 100K.2@59.382,57.629
NetR12_2: 10K.2@60.198,67.056 LM324.5 | length 18.5
  Bottom Layer w0.6: LM324.5 45.974,67.31 48.133,65.151 59.563,65.151 60.154,65.742 60.154,67.012 10K.2@60.198,67.056
NetR15_2: 10K.2@60.198,62.992 LM324.3 | length 23.9
  Bottom Layer w0.6: LM324.3 51.054,67.026 51.405,66.675 56.769,66.675 59.436,69.342 62.357,69.342 63.119,68.58 63.119,63.627 62.591,63.099 60.305,63.099 10K.2@60.198,62.992
NetR16_1: 10K.1@48.26,75.565 LM324.6 | length 8.4
  Bottom Layer w0.6: LM324.6 43.481,69.168 43.481,70.278 48.03,74.827 48.03,75.335 10K.1@48.26,75.565
NetR18_1: 10K.1@52.197,75.311 LM324.2 | length 6.8
  Bottom Layer w0.6: 10K.1@52.197,75.311 52.197,70.518 LM324.2
PWM: 10K.1@58.166,40.132 U1.15 | length 10.1
  Bottom Layer w0.6: 10K.1@58.166,40.132 59.436,38.862 64.516,38.862 65.532,37.846 U1.15
RESET: 10K.2@24.511,21.301 J2.5 RESET.1 U1.1 | length 57.2
  Top Layer w0.6: U1.1 32.512,30.226 35.179,32.893 66.193,32.893 69.507,29.579 70.617,29.579 J2.5
  Bottom Layer w0.6: 10K.2@24.511,21.301 24.575,21.364 24.575,25.768 RESET.1 31.293,25.832 32.512,27.051 U1.1 U1.1@32.575,28.511
RS: DS1.4 U1.2 | length 20.5
  Bottom Layer w0.6: DS1.4 34.671,9.273 36.322,10.924 36.322,21.971 35.052,23.241 U1.2
SCK: J2.4 U1.19 | length 19.5
  Bottom Layer w0.6: U1.19 55.372,34.036 57.618,31.79 J2.4@71.882,31.79
VCC: 1K.2 10K.1@24.511,13.681 100nF.1@47.752,23.749 100nF.1@93.853,40.854 DS1.2 DS1.15 J2.1 LM7805.3 U1.7 U1.20 VR1.3 | length 158.8
  Bottom Layer w1: DS1.2 29.527,9.189 29.527,14.287 VR1.3 25.462,14.351 24.792,13.681 24.511,13.681 24.511,12.192 25.146,11.557 25.146,6.35 25.965,5.531 60.903,5.531 62.611,7.239 DS1.15 ; 42.418,5.531 42.418,30.099 44.069,31.75 47.752,31.75 ; 100nF.1@47.752,23.749 U1.7 47.752,31.75 ; 1K.2 89.916,44.502 LM7805.3 ; 100nF.1@93.853,40.854 93.706,41.001 90.063,41.001 LM7805.3 ; 47.752,31.75 50.927,31.75 52.832,33.655 U1.20 52.832,39.497 55.499,42.164 69.596,42.164 70.866,40.894 J2.1 85.05,39.33 86.868,41.148 LM7805.3
VIN: 10uF.1@94.488,28.067 +12V.1 LM324.4 LM7805.1 | length 96.6
  Top Layer w0.6: LM324.4 48.528,69.107 48.528,66.407 50.419,64.516 55.499,64.516 59.69,60.325 82.042,60.325 85.725,56.642 85.725,37.592 87.249,36.068 LM7805.1
  Bottom Layer w1: +12V.1 81.661,19.708 81.661,27.559 82.423,28.321 87.503,28.321 89.916,30.734 ; LM7805.1@89.916,35.998 89.916,30.734 ; 10uF.1@94.488,28.067 94.373,28.182 92.468,28.182 89.916,30.734
VS: 10K.1@71.882,55.118 100K.2@72.009,57.404 U1.23 | length 51.8
  Bottom Layer w0.6: U1.23 45.212,42.418 48.26,45.466 73.66,45.466 75.184,46.99 75.184,54.767 74.833,55.118 71.882,55.118 71.945,55.181 71.945,57.34 100K.2@72.009,57.404
pads on no net: DS1.S1 DS1.S2 Q1.4 Q1.5 Q2.4 Q2.5 Q3.4 Q3.5 Q4.4 Q4.5 U1.14

## Polygon pours and split planes (outlines as drawn)
GND on Bottom Layer "GND_L02_P000" (solid, remove dead copper, pour order 0): 0,0 0.001,-0.001 99.824,-0.001 99.824,90.422 99.822,90.424 0,90.424

## Other copper
Bottom Layer:
  pour cut-out: 47.498,47.625 50.292,50.419 50.927,50.419 50.927,52.959 50.038,53.848 40.894,53.848 40.132,53.086 40.132,50.038 38.735,48.641 38.735,46.99
  pour cut-out: 45.593,22.352 47.371,22.352 47.879,22.86 47.752,22.987 47.752,28.448 45.212,28.448
  pour cut-out: 55.499,24.892 58.928,24.892 58.928,27.178 57.531,28.575 57.404,28.448 55.372,28.448
  pour cut-out: 55.626,13.081 55.499,13.208 55.499,20.828 52.832,20.828 51.562,19.558 51.562,13.843 52.324,13.081
  pour cut-out: 63.754,12.065 63.754,9.144 63.627,9.017 62.611,10.033 61.595,10.033
  pour cut-out: 53.086,32.893 55.88,32.893 55.88,37.592 53.086,37.592
  pour cut-out: 69.342,70.993 69.088,70.739 69.088,67.056 68.961,67.056 67.183,65.278 67.183,62.103 67.056,62.103 66.421,61.468 50.525,61.468 50.014,61.979 50.038,62.003 50.038,70.485 49.403,71.12
  pour cut-out: 63.881,76.823 63.881,68.072 53.34,68.072 51.816,69.596 52.324,70.104 52.324,73.406 52.959,76.835 57.658,76.835 62.23,76.835 62.357,76.962
  pour cut-out: 45.847,76.394 45.847,80.137 50.419,80.137 53.34,77.216 53.34,70.485 50.165,67.31 48.133,69.342 41.783,69.342 40.513,70.612 40.513,75.692
  pour cut-out: 45.466,88.138 49.784,83.82 51.435,83.82 51.435,82.804 49.53,80.899 46.482,83.947 30.48,83.947 30.48,87.884 29.972,88.392
  pour cut-out: 56.867,84.051 56.971,83.947 61.722,83.947 61.722,82.804 59.055,80.137 58.801,80.391 56.388,80.391 56.515,80.518
  pour cut-out: 86.487,88.138 86.487,78.232 86.868,77.851 87.249,78.232 91.059,78.232 91.059,87.884 90.678,88.265

## Silkscreen, mask and mechanical layers (free items; w line width, h text height)
Top Overlay:
  lines w0.4: 0,0 100,0 100,90.043 0,90.043 0,0
  lines w1: 0.254,4.572 17.526,4.572 ; 0.381,24.257 17.653,24.257 ; 0.381,42.291 17.653,42.291 ; 0.381,63.881 17.78,63.881 17.78,4.572 17.526,4.572 ; 17.526,4.572 17.526,4.572
  text "*" at 55.499,74.422 h1.52
  text "*" at 55.626,68.326 h1.52
  text "VCC" at 75.057,38.608 h1.52
  text "MOSI" at 75.057,35.941 h1.52
  text "MISO" at 75.057,33.401 h1.52
  text "SCK" at 74.803,30.734 h1.52
  text "RST" at 74.93,28.194 h1.52
  text "GND" at 74.803,25.654 h1.52
  text "TEST" at 4.945,1.135 h2